# Altium PCB PCB_1_layer.PcbDoc
Units mm, origin at the board's own origin, x right, y up, seen from the top; angles counter-clockwise.
Board outline 50.04 x 32.77 mm, 2 copper layers (Top Layer, Bottom Layer); 12 components, 8 nets, 36 pads, 4 vias.
Unrouted connection lines stored in the file: 2.
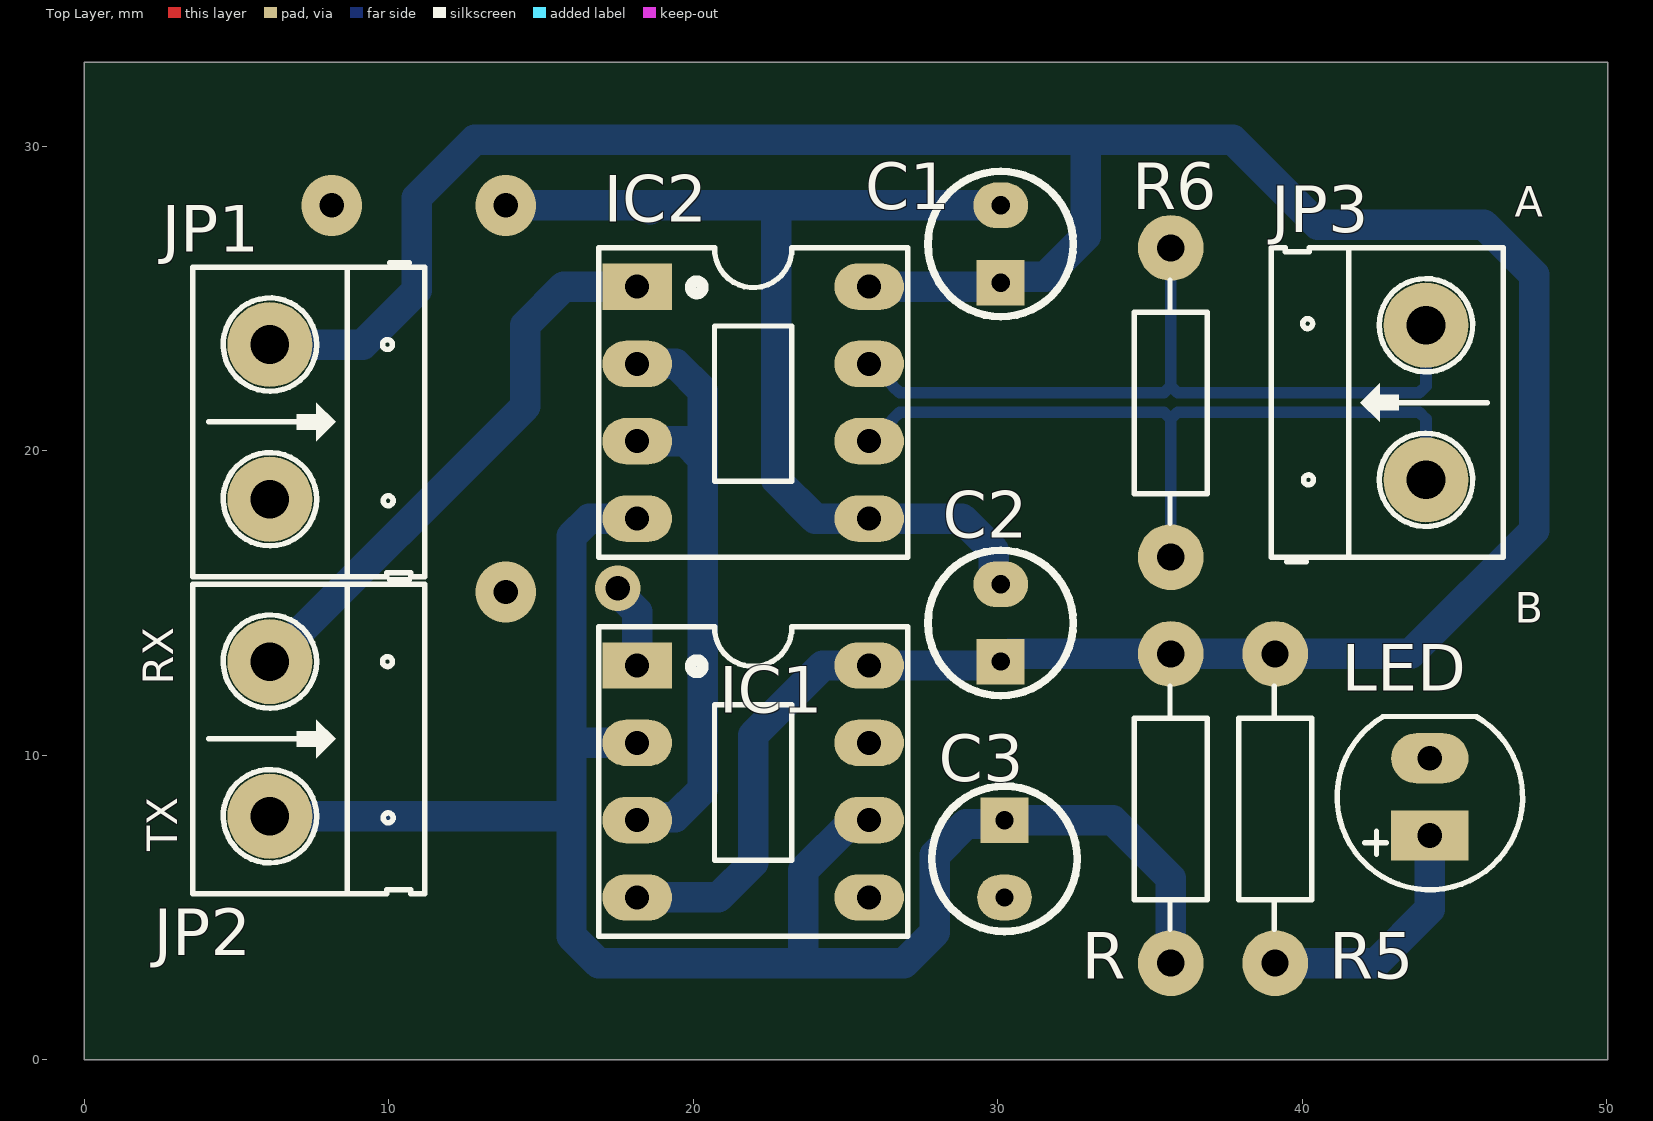
[diagram p0: Top Layer view]
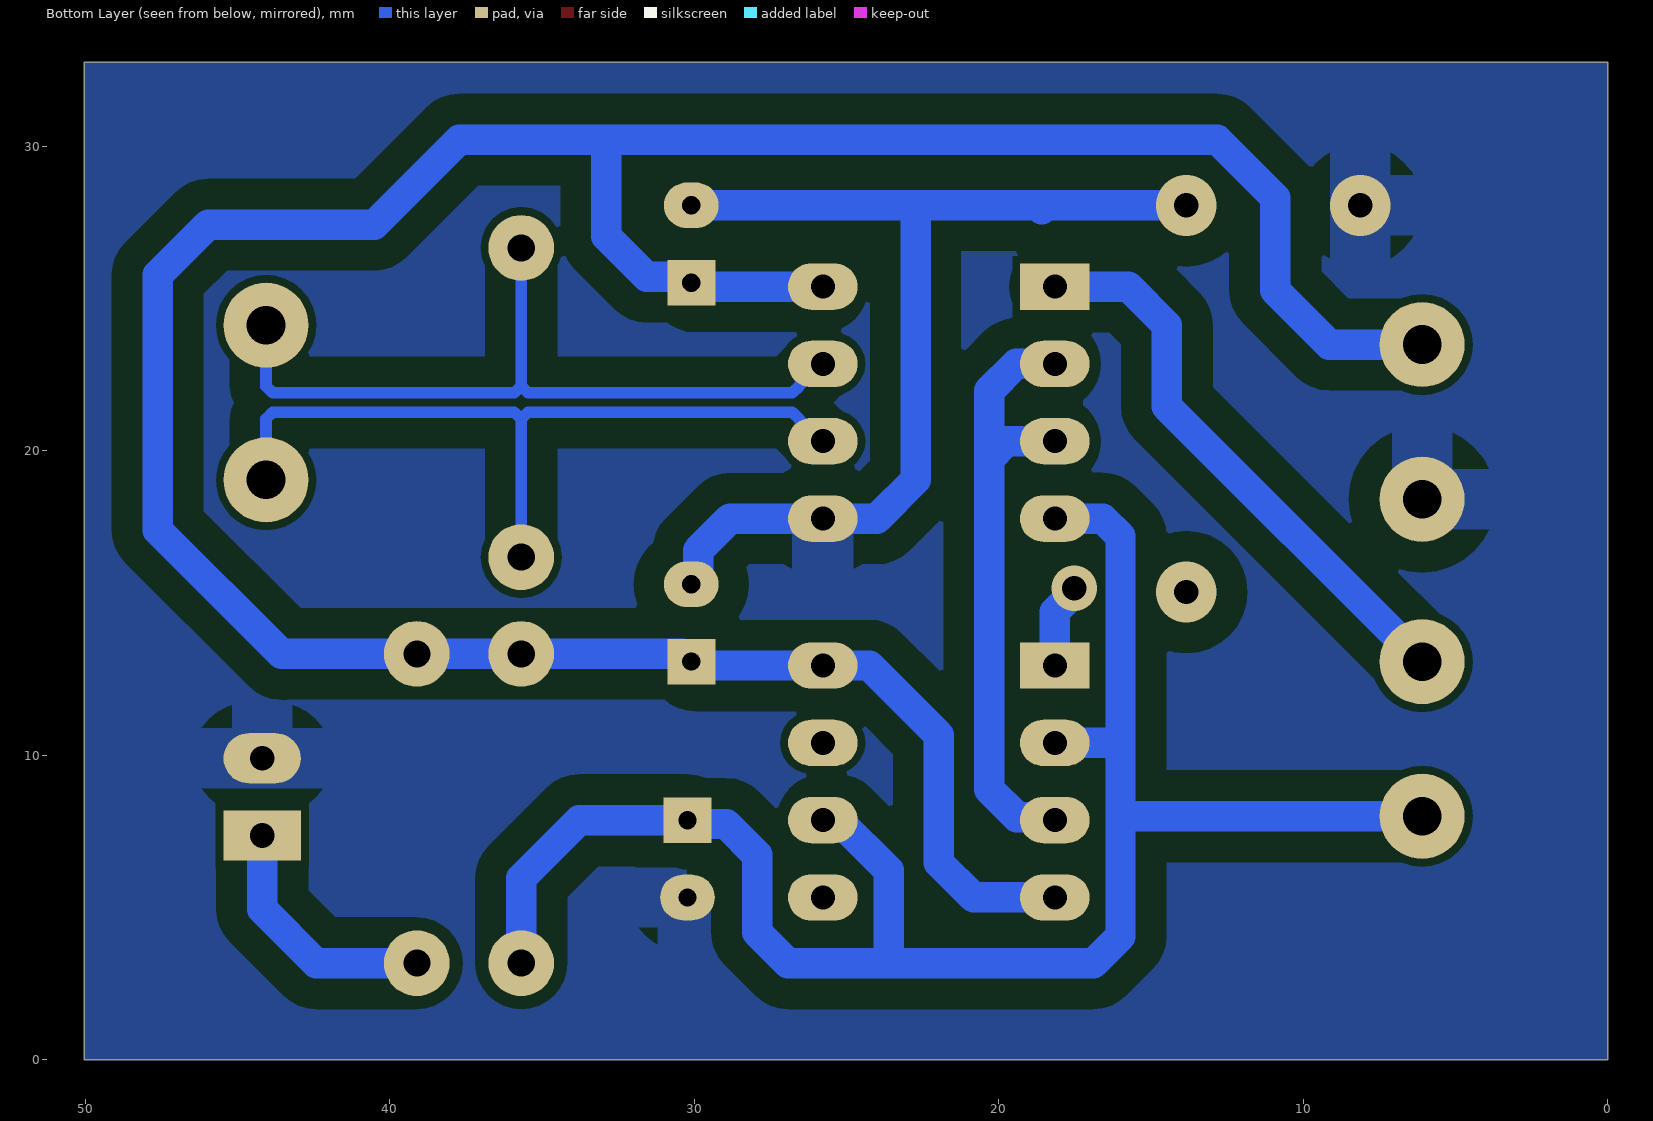
[diagram p1: Bottom Layer view, seen from below]
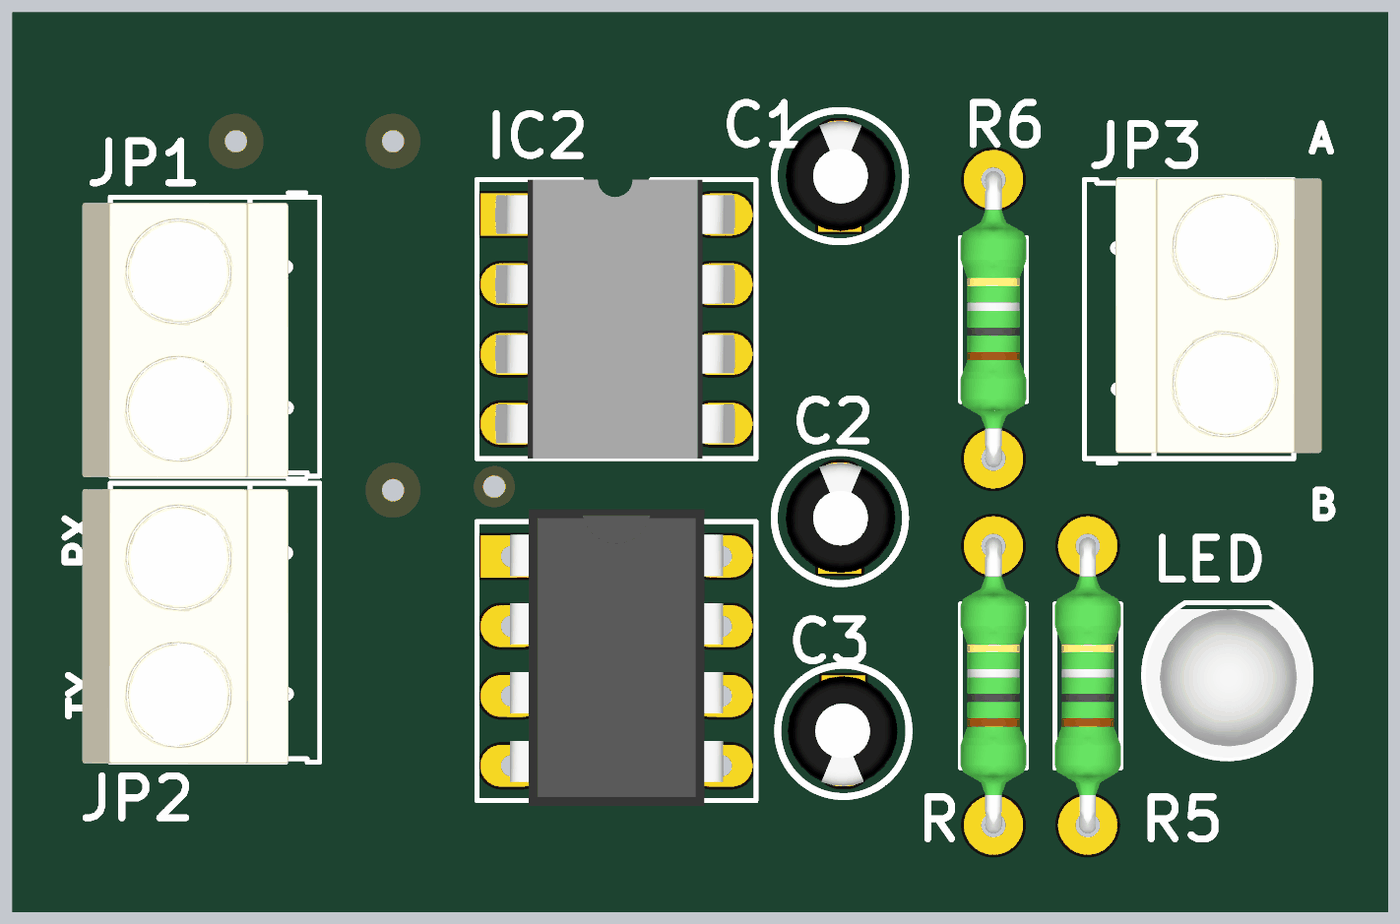
[diagram p2: 3D render of the assembled board from above, using the file's embedded part models]

## Layer stack, top to bottom
Top Solder: solder mask 0.0102, Solder Resist, Dk 3.5
Top Layer: signal copper 0.0356
Dielectric 1: dielectric 0.32, FR-4, Dk 4.8
Bottom Layer: signal copper 0.0356
Bottom Solder: solder mask 0.0102, Solder Resist, Dk 3.5

## Board outline
0,0 50.038,0 50.038,32.766 0,32.766

## Design rules (kind name [scope] priority, off if disabled: settings)
Clearance Clearance_3 [InNamedPolygon('Bottom Layer-No Net')] p1: gap=0.254 ignorepadtopadclearanceinfootprint=FALSE except(0: Arc-Hole Track-Hole SMDPad-Hole THPad-Hole Via-Hole Fill-Hole Poly-Hole Region-Hole Text-Hole; 1: Arc-Fill Arc-Poly Arc-Region Track-Fill Track-Poly Track-Region Via-Fill Via-Poly Via-Region Fill-Fill Fill-Poly Fill-Region Poly-Poly Poly-Region Region-Region)
Clearance Clearance_2 [InNamedPolygon('Bottom Layer-No Net')] p2: gap=0.254 ignorepadtopadclearanceinfootprint=FALSE except(0: Arc-Hole Track-Hole SMDPad-Hole THPad-Hole Via-Hole Fill-Hole Poly-Hole Region-Hole Text-Hole; 1: Arc-Fill Arc-Poly Arc-Region Track-Fill Track-Poly Track-Region Via-Fill Via-Poly Via-Region Fill-Fill Fill-Poly Fill-Region Poly-Poly Poly-Region Region-Region)
Clearance Clearance_1 [InNamedPolygon('Bottom Layer-No Net')] p3: gap=0.254 ignorepadtopadclearanceinfootprint=FALSE except(0: Arc-Hole Track-Hole SMDPad-Hole THPad-Hole Via-Hole Fill-Hole Poly-Hole Region-Hole Text-Hole; 1.5: Arc-Fill Arc-Poly Arc-Region Track-Fill Track-Poly Track-Region Via-Fill Via-Poly Via-Region Fill-Fill Fill-Poly Fill-Region Poly-Poly Poly-Region Region-Region)
Clearance [All] p4: gap=0.254 ignorepadtopadclearanceinfootprint=FALSE except(0: Arc-Hole Track-Hole SMDPad-Hole THPad-Hole Via-Hole Fill-Hole Poly-Hole Region-Hole Text-Hole; 1.5: Arc-Fill Arc-Poly Arc-Region Track-Fill Track-Poly Track-Region Via-Fill Via-Poly Via-Region Fill-Fill Fill-Poly Fill-Region Poly-Poly Poly-Region Region-Region)
DiffPairsRouting [All] p1: maxlimit=0.254 minlimit=0.254 mostfreqgap=0.254 toplayer_minwidth=0.381 toplayer_maxwidth=0.381 toplayer_prefwidth=0.381 bottomlayer_minwidth=0.381 bottomlayer_maxwidth=0.381 bottomlayer_prefwidth=0.381 maxuncoupledlength=12.7
PolygonConnect PolygonConnect_3 [All vs IsNamedPolygon('Bottom Layer-No Net')] p1: connectstyle=Relief reliefconductorwidth=2 reliefentries=4 polygonreliefangle="90 Angle" airgapwidth=1
PolygonConnect PolygonConnect_2 [All vs IsNamedPolygon('Bottom Layer-No Net')] p2: connectstyle=Relief reliefconductorwidth=2 reliefentries=4 polygonreliefangle="90 Angle" airgapwidth=1
PolygonConnect PolygonConnect_1 [All vs IsNamedPolygon('Bottom Layer-No Net')] p3: connectstyle=Relief reliefconductorwidth=2 reliefentries=4 polygonreliefangle="90 Angle" airgapwidth=1
PolygonConnect [All] p4: connectstyle=Relief reliefconductorwidth=0.254 reliefentries=4 polygonreliefangle="90 Angle" airgapwidth=0.254
RoutingVias [All] p1: holewidth=0.711 width=1.27 viastyle="Through Hole" minholewidth=0.711 minwidth=1.27 maxholewidth=0.711 maxwidth=1.27
SolderMaskExpansion [All] p1: expansion=0.102
Width [All] p1: maxlimit=2 minlimit=0.254 preferedwidth=1 toplayer_maxwidth=0.254 toplayer_prefwidth=0.254 bottomlayer_minwidth=0.5 minimp=50.000000 maximp=50.000000 favimp=50.000000
29 further rules are at their usual default settings.

## Classes and differential pairs
differential pair class RS485_DIFFPAIR: RS485
differential pair RS485: +RS485_P -RS485_N

## Components (designator, comment, footprint, x,y, rotation, side; value= is the part's Value field where it differs from the comment)
C1 "22uF" CA-ALU-2.54 30.099,26.797 r90 top value=104
C2 "22uF" CA-ALU-2.54 30.099,14.351 r90 top value=104
C3 "22uF" CA-ALU-2.54 30.226,6.604 r270 top value=104
IC1 "LM555" DIP8 21.971,9.271 r270 top
IC2 "MAX485" DIP8/W0.3 18.161,25.4 r270 top
JP1 "Header 2_1" HED2 6.096,23.495 r270 top value="Header 2"
JP2 "Header 2_1" HED2 6.096,13.081 r270 top value="Header 2"
JP3 "Header 2_1" HED2 44.069,19.05 r90 top value="Header 2"
LED "LED" LED-5-Green 44.196,7.366 r90 top value="LED 3 ly Single Colour"
R "100" RES-1/4W 35.56,7.874 r270 top
R5 "220" RES-1/4W 38.989,7.874 r270 top
R6 "120" RES-1/4W 35.56,21.209 r270 top

## Footprints (in the part's own frame and the unit in brackets; to place one, negate y for a bottom-side part, rotate by r counter-clockwise, add the part's x,y. Pads: shape width x height; smd on the part's side, far side on the other; paste and mask are expansions set on the pad)
CA-ALU-2.54 [mm]
  rect 1.5x1.58 hole 0.6: 1(-1.27,0)
  oval 1.5x1.8 hole 0.6: 2(1.27,0)
  silkscreen extent -2.39,-2.39 2.39,2.39, body extent -2,-2.03 1.99,1.97, height 7.01
DIP8 [mil] "DIP, 8-Leads, Row Spacing 7.62mm, Pitch 2.54mm, Body 9.91x6.73mm"
  rect 60x90 hole 31: 1(-145,-150)
  oval 60x90 hole 31: 2(-45,-150) 3(55,-150) 4(155,-150) 5(155,150) 6(55,150) 7(-45,150) 8(-145,150)
  silkscreen extent -195,-200 205,200, body extent -213,-153 213,153, height 177
DIP8/W0.3 [mil] "8 PIN, W 300mil, Pin to pin 100mil"
  rect 60x90 hole 31: 1(0,0)
  oval 60x90 hole 31: 2(100,0) 3(200,0) 4(300,0) 5(300,300) 6(200,300) 7(100,300) 8(0,300)
  silkscreen extent -50,-50 350,350, body extent -50,-40 350,336, height 201
HED2 [mil] "Header 2, 2 pin, hight 300mil, Pin to Pin 200, Colour Green"
  round 110 hole 50: 1(0,0) 2(200,0)
  silkscreen extent -106,-100 300,200, body extent -92,-140 302,155, height 394
LED-5-Green [mil] "LED 2 PIN, 5 ly , Only colour,pin to pin 100mil"
  rect 65x100 hole 32: 1(0,0)
  oval 65x100 hole 32: 2(100,0)
  silkscreen extent -70,-120 154,120, body extent -69,-120 145,117, height 339
RES-1/4W [mil]
  round 85 hole 35: 1(-215,5) 2(185,5)
  silkscreen extent -173,-42 141,52, body extent -227,-42 197,52, height 95

## Part data
C1 C2 C3: library part CN-ALU-DIP, "Capacitor (Semiconductor SIM Model)", LatestRevisionDate=17-Jul-2002, LatestRevisionNote="Re-released for DXP Platform.", PackageReference=C1206, Publisher="Altium Limited"
IC1: "Timer"
IC2: "RS232 - RS485 (Same sn75176)"
JP1 JP2 JP3: "Header, 2-Pin", Manufacturer="Generic Components", Class=Connector
LED: "LED Single colour Green and Red"
R R5 R6: library part Res, "Res", Manufacturer="Generic Components", Class=Passive, Published=08/06/2000, Publisher="Altium Hobart Technology Centre", SubClass=R

## Via types
v1: diameter 2, hole 0.8, Top Layer to Bottom Layer, tented both sides, 3 vias
v2: diameter 1.5, hole 0.8, Top Layer to Bottom Layer, tented both sides, 1 vias

## Nets (pads, with @x,y where several pads share a name; then routed paths per layer and width w, separated by ;. In a path a pad name is that pad's centre, name@x,y a point inside that pad or via, vN(x,y) a via of type N, cw(c..) or ccw(c..) an arc to the next point about the centre after c; other vN are vias at no path point)
EN: IC1.3 IC2.2 IC2.3 | length 20.6
  Bottom Layer w1: IC1.3 18.261,7.974 19.404,7.974 20.32,8.89 20.32,19.734 ; IC2.3 18.164,20.317 19.738,20.317 20.32,19.734 ; IC2.2 19.431,22.86 20.32,21.971 20.32,19.734
GND: C1.2 C2.2 C3.2 IC1.1 IC2.5 JP1.2 LED.2 | length 37.7
  Bottom Layer w1: v1(13.843,28.067) 18.465,28.067 ; v2(17.526,15.494) 17.526,15.359 18.161,14.724 IC1.1 ; 18.592,27.94 18.465,28.067 ; C2.2 29.878,15.842 29.878,16.731 28.829,17.78 IC2.5 24.003,17.78 22.733,19.05 22.733,28.067 ; C1.2 29.972,27.94 29.845,28.067 22.733,28.067 ; 18.465,28.067 22.733,28.067
  other v1: 8.128,28.067
NetLED_1: LED.1 R5.2 | length 8.2
  Bottom Layer w1: R5.2 42.418,3.175 44.196,4.953 LED.1
RS485_N: IC2.7 JP3.2 R6.1 | length 25.5
  Bottom Layer w0.381: IC2.7 25.853,22.86 26.557,22.156 26.557,22.131 26.78,21.907 35.464,21.907 35.687,22.131 ; R6.1 35.687,22.131 ; JP3.2 44.069,22.131 43.846,21.907 35.91,21.907 35.687,22.131
RS485_P: IC2.6 JP3.1 R6.2 | length 25.5
  Bottom Layer w0.381: IC2.6 25.853,20.32 26.557,21.024 26.557,21.049 26.78,21.273 35.464,21.273 35.687,21.049 ; R6.2 35.687,21.049 ; JP3.1 44.069,21.049 43.846,21.273 35.91,21.273 35.687,21.049
RX: IC2.1 JP2.1 | length 18.7
  Bottom Layer w1: JP2.1 14.478,21.463 14.478,24.13 15.748,25.4 IC2.1
TX: C3.1 IC1.2 IC1.6 IC2.4 JP2.2 R.2 | length 60.6
  Bottom Layer w1: JP2.2 15.875,8.001 16.002,7.874 ; IC1.2 16.002,10.414 ; IC2.4 18.158,17.777 16.584,17.777 16.002,17.194 16.002,10.414 ; IC1.6 25.273,7.874 23.622,6.223 23.622,3.175 ; R.2 35.687,5.969 33.782,7.874 C3.1 30.099,7.747 28.956,7.747 27.94,6.731 27.94,4.191 26.924,3.175 23.622,3.175 ; 16.002,7.874 16.002,10.414 ; 16.002,7.874 16.002,4.064 16.891,3.175 23.622,3.175
VCC: C1.1 C2.1 IC1.4 IC1.8 IC2.8 JP1.1 R5.1 R.1 | length 104.2
  Bottom Layer w1: JP1.1 9.144,23.495 10.922,25.273 10.922,28.321 12.827,30.226 32.893,30.226 ; IC1.4 20.828,5.334 21.971,6.477 21.971,10.668 24.257,12.954 IC1.8 29.972,12.954 C2.1 30.139,13.081 30.393,13.335 R.1 R5.1 43.561,13.335 47.625,17.399 47.625,25.781 45.974,27.432 40.513,27.432 37.719,30.226 32.893,30.226 ; IC2.8 29.972,25.4 C1.1 30.295,25.723 31.565,25.723 32.893,27.051 32.893,30.226
pads on no net: IC1.5 IC1.7
copper on no net:
  other v1: 13.843,15.367

## Polygon pours and split planes (outlines as drawn)
GND on Bottom Layer "Bottom Layer-No Net" (solid, pour order 0): 0,0 50.038,0 50.038,32.766 0,32.766

## Silkscreen, mask and mechanical layers (free items; w line width, h text height)
Top Overlay:
  text "A" at 46.99,27.686 h1
  text "B" at 46.99,14.351 h1
  text "RX" at 2.921,12.319 h1 r90
  text "TX" at 3.048,6.858 h1 r90